# EAGLE board Transistor Tester (EAGLE 6.5.0)
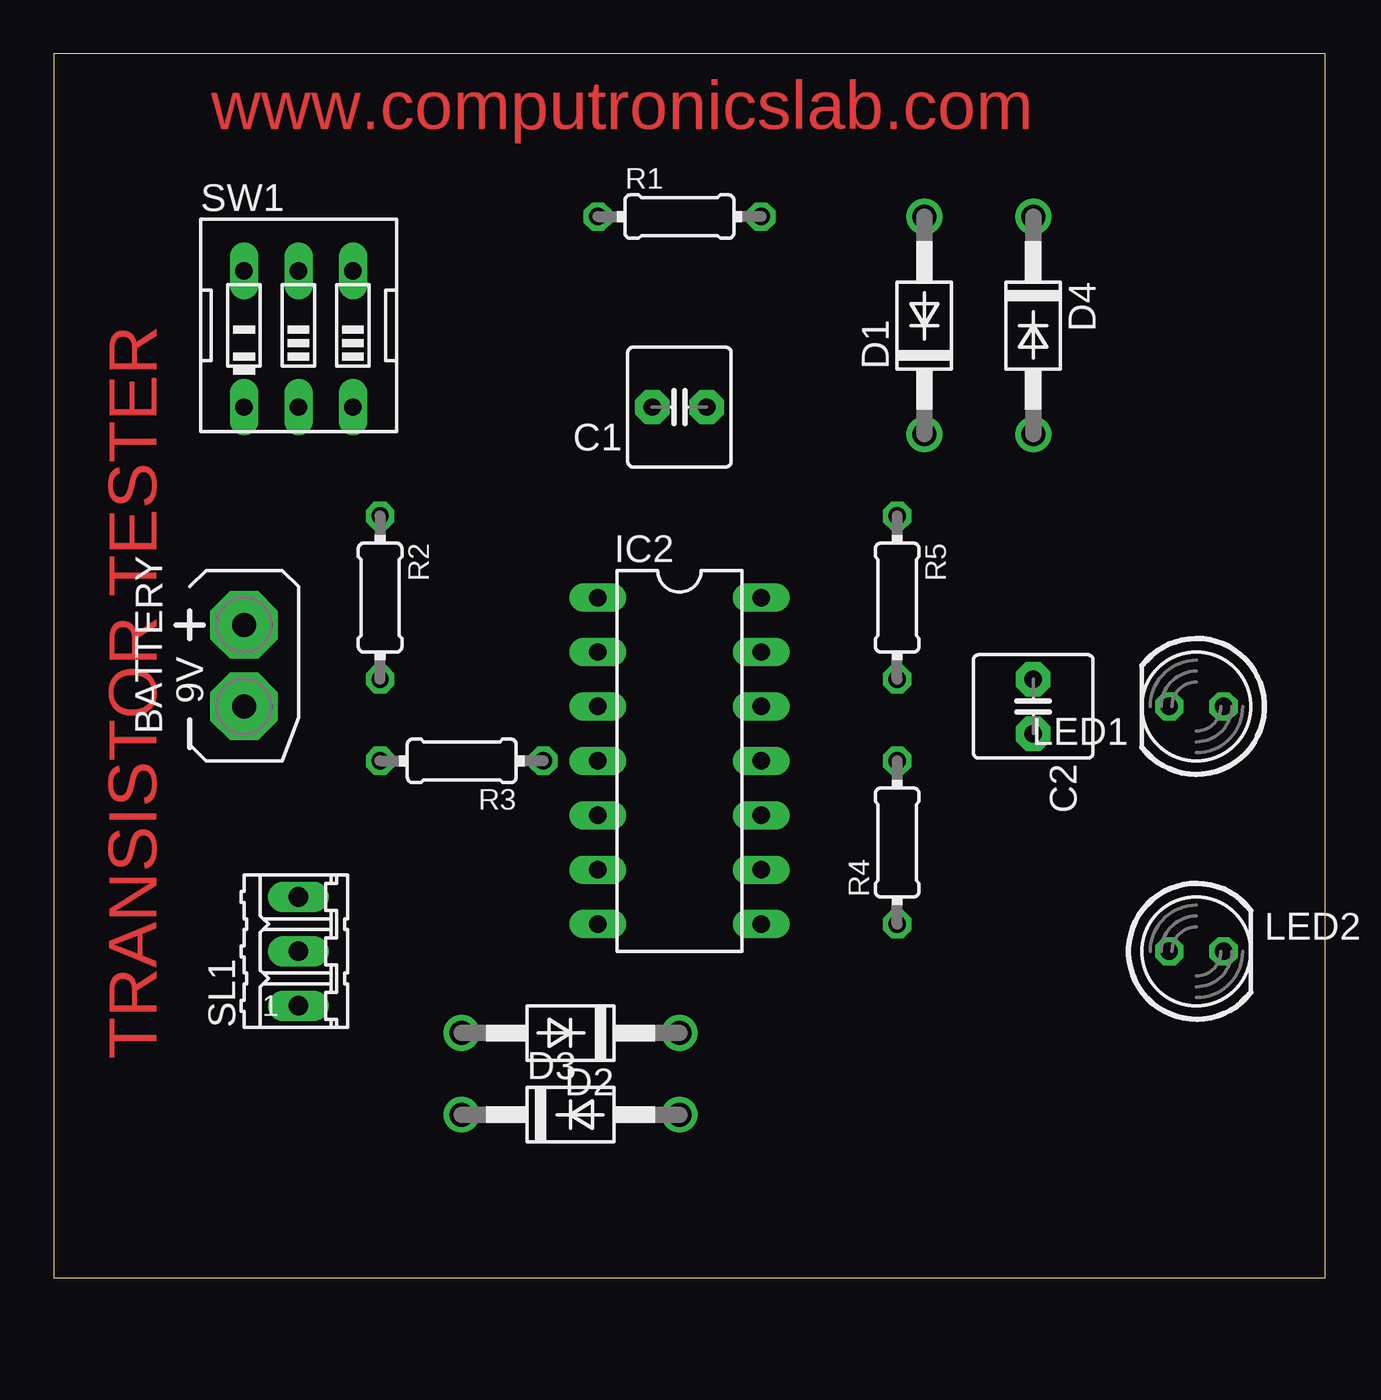
[diagram p0: board, top side]
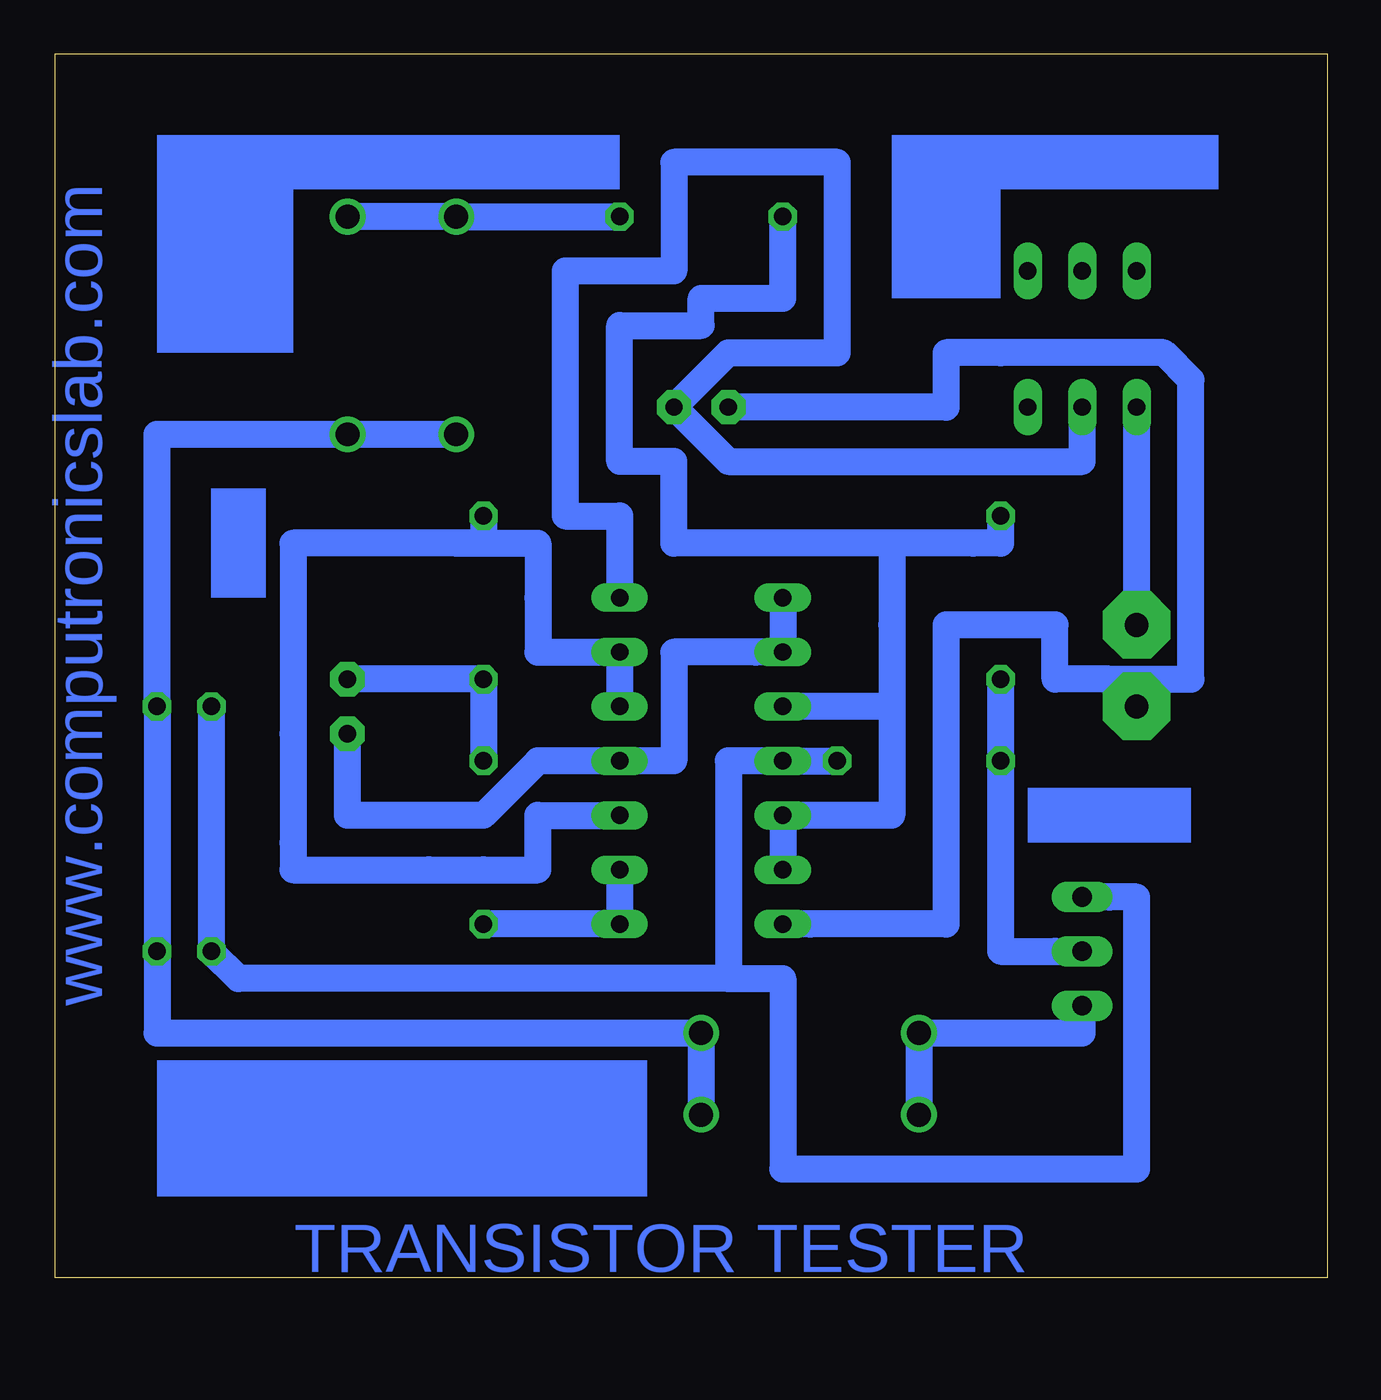
[diagram p1: board, bottom side, seen from below]

Size 59.36 x 57.14 mm. Coordinates in mm from the lower left corner, seen from the top.
Outline: 0,0 59.36,0 59.36,57.14 0,57.14 0,0
Copper layers (1*16): Top 0.035mm / dielectric 1.5mm / Bottom 0.035mm
Design rules "default *": minimum track width 50mil, minimum drill 24mil, track to track 8mil, track to pad 8mil, pad to pad 8mil, via to via 8mil, smd to smd 8mil, copper to edge 40mil, drill to drill 8mil, minimum pad ring 10mil, minimum via ring 8mil, stop-mask expansion 4mil, vias tented up to drill 0mil, thermal gap 10mil

## Footprints (pad centres in the part's own frame; a part is rotated, then mirrored left to right if it is on the bottom)
AB9V = drill 1.118 pad 3.15 octagon: + 0,2.54; - 0,-1.27
C2.5-6 = drill 0.813 pad 1.6 octagon: 1 -1.27,0; 2 1.27,0
DO41-10 = drill 1.118: A 5.08,0; C -5.08,0
DIL14 = drill 0.813 long: 1 -7.62,-3.81; 2 -5.08,-3.81; 3 -2.54,-3.81; 4 0,-3.81; 5 2.54,-3.81; 6 5.08,-3.81; 7 7.62,-3.81; 8 7.62,3.81; 9 5.08,3.81; 10 2.54,3.81; 11 0,3.81; 12 -2.54,3.81; 13 -5.08,3.81; 14 -7.62,3.81
LED5MM = drill 0.813 octagon: A -1.27,0; K 1.27,0
0204/7 = drill 0.813 octagon: 1 -3.81,0; 2 3.81,0
03P = drill 0.914 long: 1 -2.54,0; 2 0,0; 3 2.54,0
EDG-03 = drill 0.813 long: 1 -2.54,-3.81; 2 0,-3.81; 3 2.54,-3.81; 4 2.54,2.54; 5 0,2.54; 6 -2.54,2.54

## Placement (x,y rotation side)
BATTERY  9V  [AB9V]  8.89,27.94 0 top
C1  100uf  [C2.5-6]  29.21,40.64 180 top
C2  0.01uf  [C2.5-6]  45.72,26.67 270 top
D1  1N4007  [DO41-10]  40.64,44.45 90 top
D2  1N4007  [DO41-10]  24.13,11.43 180 top
D3  1N4007  [DO41-10]  24.13,7.62 0 top
D4  1N4007  [DO41-10]  45.72,44.45 270 top
IC2  CD4011  [DIL14]  29.21,24.13 270 top
LED1  5mm  [LED5MM]  53.34,26.67 180 top
LED2  5mm  [LED5MM]  53.34,15.24 0 top
R1  220E  [0204/7]  29.21,49.53 0 top
R2  220E  [0204/7]  15.24,31.75 270 top
R3  330E  [0204/7]  19.05,24.13 180 top
R4  1M  [0204/7]  39.37,20.32 90 top
R5  1M  [0204/7]  39.37,31.75 270 top
SL1  3 pin  [03P]  11.43,15.24 90 top
SW1  on/off switch  [EDG-03]  11.43,44.45 0 top

## Library data of the parts
BATTERY = battery
C1 C2 = capacitor-wima
D1-D4 = diode
IC2 = maxim; OC_FARNELL: unknown; OC_NEWARK: 77C6395
LED1 LED2 = led
R1-R5 = rcl
SL1 = con-amp-quick; OC_FARNELL: unknown; OC_NEWARK: unknown
SW1 = special

## Nets
N$1: C2.2 IC2.1 IC2.2 IC2.11
N$2: IC2.3 IC2.5 IC2.6 R1.1 R2.1
N$3: IC2.8 IC2.9 R4.1
N$4: IC2.10 IC2.12 IC2.13 R5.1
N$5: C2.1 R4.2 R5.2
N$6: BATTERY.+ SW1.1
N$7: C1.1 IC2.14 SW1.2
N$8: BATTERY.- C1.2 IC2.7
N$9: D1.A D4.C R1.2
N$11: R2.2 R3.2 SL1.2
N$12: IC2.4 LED1.K LED2.A R3.1 SL1.3
N$13: D1.C D2.C D3.A D4.A LED1.A LED2.K
N$14: D2.A D3.C SL1.1

## Tracks (layer width: path | path; a pad name or v marks a point on that pad's centre or on a via)
N$1
  Bottom 1.27: IC2.1 IC2.2 26.67,29.21 30.48,29.21 30.48,24.13 31.75,24.13 IC2.11 36.83,24.13 39.37,21.59 41.91,21.59 45.72,21.59 C2.2
N$2
  Bottom 1.27: IC2.6 IC2.5 20.32,21.59 20.32,26.67 | R2.1 15.24,34.29 16.51,34.29 20.32,34.29 | 20.32,34.29 20.32,30.48 20.32,26.67 | 20.32,26.67 IC2.3 | R1.1 25.4,45.72 29.21,45.72 29.21,44.45 33.02,44.45 33.02,38.1 30.48,38.1 30.48,34.29 20.32,34.29
N$3
  Bottom 1.27: IC2.9 IC2.8 R4.1
N$4
  Bottom 1.27: IC2.12 IC2.13 35.56,29.21 36.83,29.21 36.83,31.75 36.83,34.29 40.64,34.29 | IC2.10 36.83,21.59 36.83,19.05 39.37,19.05 41.91,19.05 48.26,19.05 48.26,20.32 48.26,25.4 48.26,34.29 40.64,34.29 | R5.1 39.37,34.29 40.64,34.29
N$5
  Bottom 1.27: R4.2 R5.2 C2.1
N$6
  Bottom 1.27: BATTERY.+ SW1.1
N$7
  Bottom 1.27: SW1.2 11.43,38.1 27.94,38.1 C1.1 27.94,43.18 22.86,43.18 22.86,52.07 30.48,52.07 30.48,46.99 35.56,46.99 35.56,35.56 33.02,35.56 IC2.14
N$8
  Bottom 1.27: IC2.7 24.13,16.51 17.78,16.51 17.78,22.86 17.78,30.48 12.7,30.48 12.7,27.94 10.16,27.94 | BATTERY.- 10.16,27.94 | C1.2 17.78,40.64 17.78,43.18 15.24,43.18 7.62,43.18 6.35,41.91 6.35,27.94 10.16,27.94
N$9
  Bottom 1.27: R1.2 D1.A D4.C
N$11
  Bottom 1.27: R2.2 R3.2 15.24,17.78 15.24,15.24 12.7,15.24 SL1.2
N$12
  Bottom 1.27: LED1.K LED2.A 50.8,13.97 27.94,13.97 | R3.1 IC2.4 27.94,24.13 27.94,13.97 | SL1.3 10.16,17.78 8.89,17.78 8.89,16.51 8.89,5.08 19.05,5.08 25.4,5.08 25.4,13.97 27.94,13.97
N$13
  Bottom 1.27: D1.C D4.A 54.61,39.37 54.61,36.83 54.61,30.48 LED1.A LED2.K 54.61,11.43 50.8,11.43 D2.C D3.A
N$14
  Bottom 1.27: SL1.1 11.43,11.43 D2.A D3.C
(copper drawn outside any net)
  shapes: Bottom area x7

## Text on the board
Top: www.computronicslab.com | TRANSISTOR TESTER
Bottom: www.computronicslab.com | TRANSISTOR TESTER